# EAGLE board STM32F050F Base Routed (EAGLE 6.0)
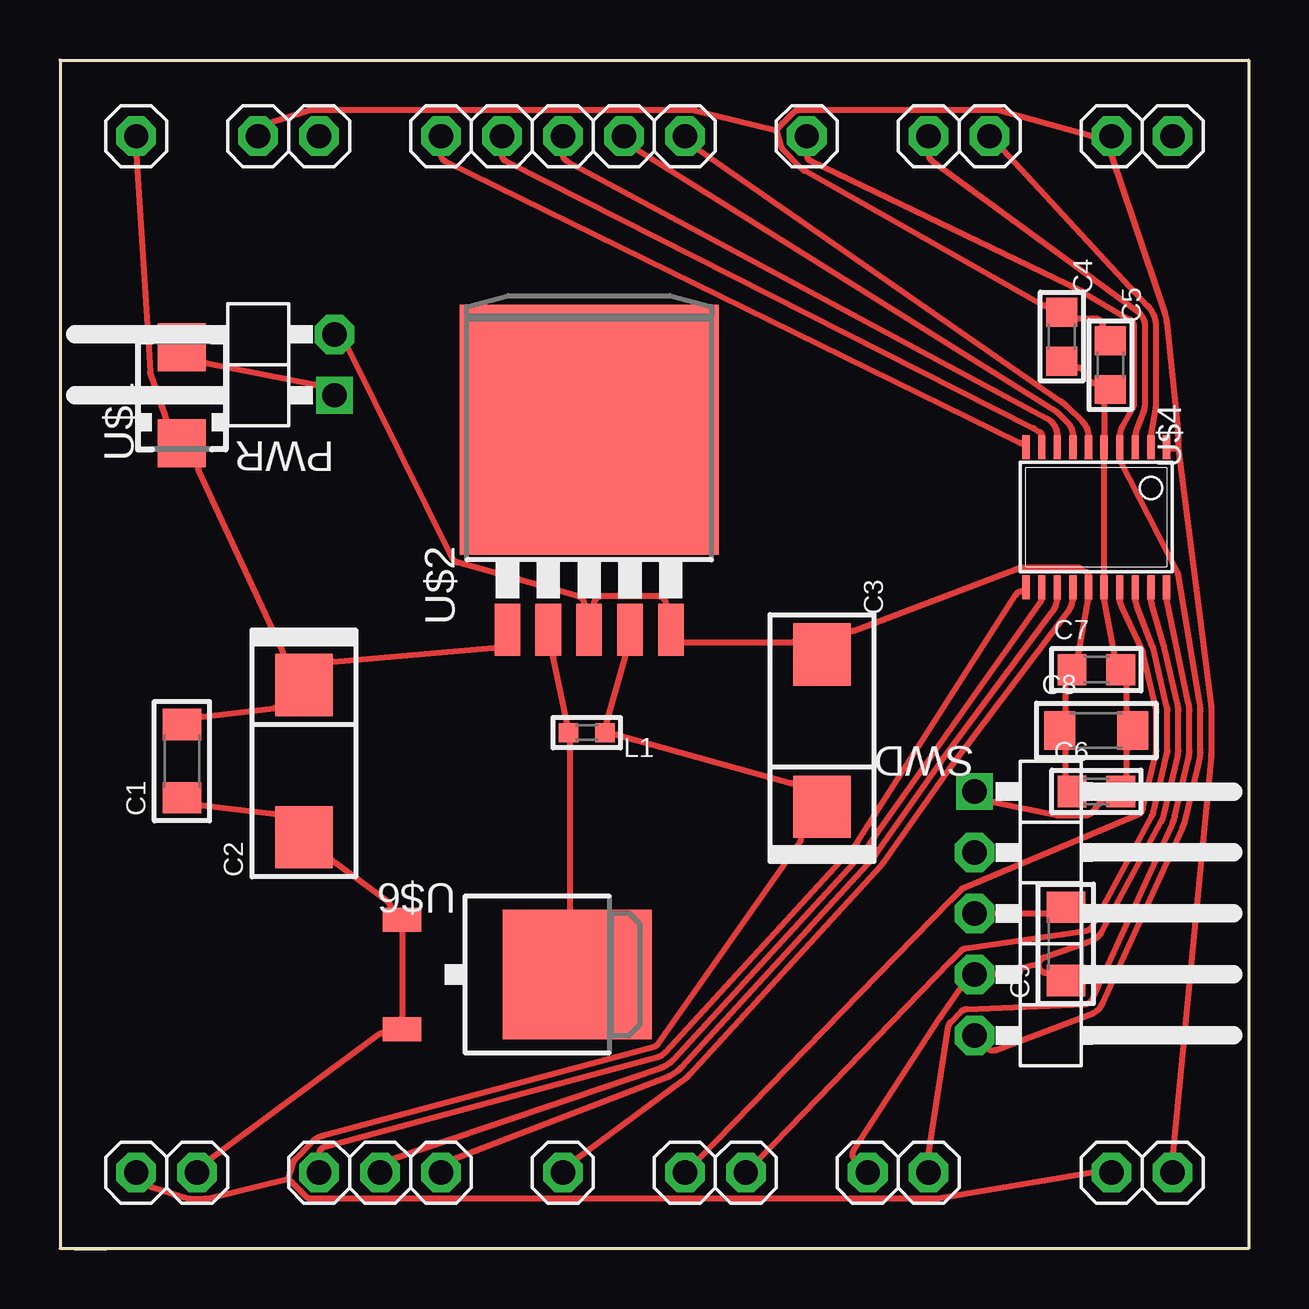
[diagram p0: board, top side]
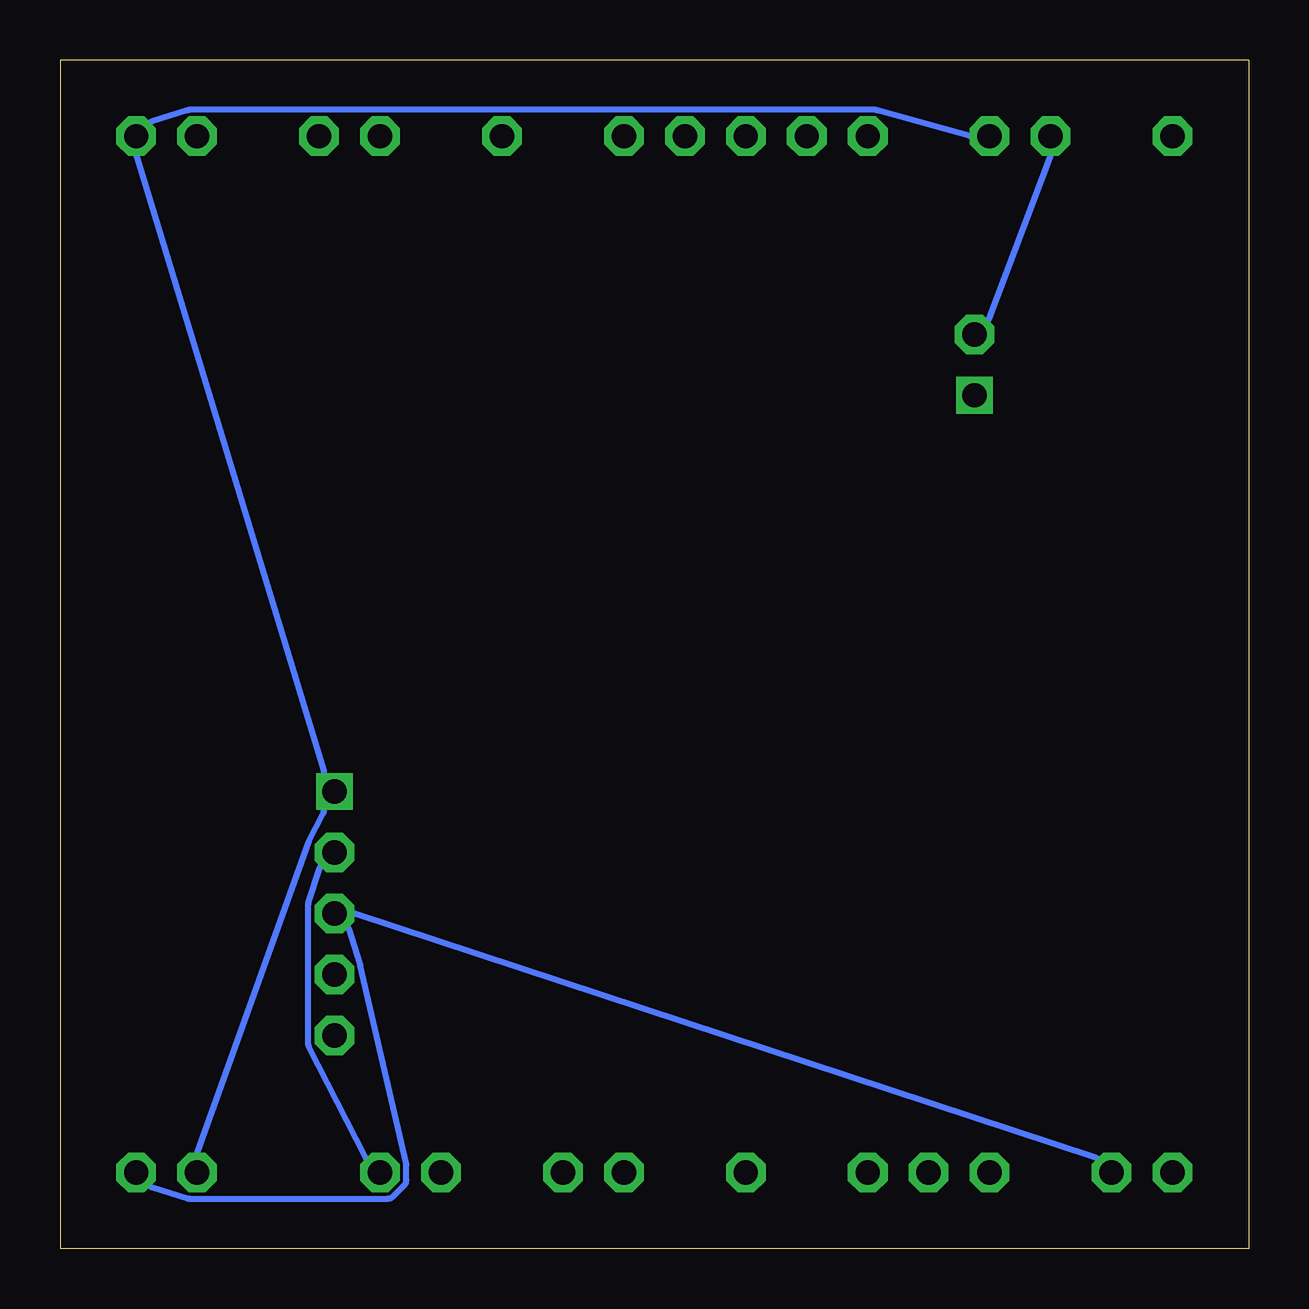
[diagram p1: board, bottom side, seen from below]

Size 49.53 x 49.53 mm. Coordinates in mm from the lower left corner, seen from the top.
Outline: 0,49.52 0,0 49.53,0 49.53,49.52
Outline: 0,49.53 49.53,49.53
Copper layers 1+16: Top 0.035mm / dielectric 0.15mm / Bottom 0.035mm
Design rules: minimum track width 0.254mm, track to track 0.2032mm, copper to edge 1.016mm, minimum pad ring 0.1mm, minimum via ring 0.1mm
Net classes: 0 default: width 0.254 mm, clearance 0.203 mm

## Footprints (pad centres in the part's own frame; a part is rotated, then mirrored left to right if it is on the bottom)
rc-master-smd$ = smd 1.3 x 1.6: 1 -1.524,0; 2 1.524,0
rc-master-smd$' = smd 2.6 x 2.4: + 3.175,0; - -3.175,0
rc-master-smd$'' = smd 1.2 x 1.3: 1 -1.016,0; 2 1.016,0
rc-master-smd$''' = smd 0.8 x 0.8: 1 -0.762,0; 2 0.762,0
pinhead-2$ = drill 1.016 pad 1.524 square: 1 -2.54,-3.81 | drill 1.016 pad 1.649 octagon: 2 0,-3.81
pinhead-2$' = drill 1.016 pad 1.524 square: 1 -5.08,-3.81 | drill 1.016 pad 1.649 octagon: 2 -2.54,-3.81; 3 0,-3.81; 4 2.54,-3.81; 5 5.08,-3.81
my-library$ = smd 2 x 2: A 2,0; C -2,0
my-library$' = smd 1.067 x 2.159: 1 -3.404,-5.791; 2 -1.702,-5.791; 3 0,-5.791; 4 1.702,-5.791; 5 3.404,-5.791 | smd 10.8 x 10.41: 6 0,2.54
my-library$'' = drill 1.016 pad 1.649 octagon: +12V 3.175,46.355; GND1 8.255,46.355; GND2 43.815,46.355; GND3 46.355,3.175; GND4 5.715,3.175; NRST 31.115,46.355; PA0 26.035,46.355; PA1 23.495,46.355; PA2 20.955,46.355; PA3 18.415,46.355; PA4 15.875,46.355; PA5 10.795,3.175; PA6 13.335,3.175; PA7 15.875,3.175; PA9 26.035,3.175; PA10 28.575,3.175; PA13 33.655,3.175; PA14 36.195,3.175; PB1 20.955,3.175; PF0 38.735,46.355; PF1 36.195,46.355; VDD1 10.795,46.355; VDD2 46.355,46.355; VDD3 43.815,3.175; VDD4 3.175,3.175
STM32F0$ = smd 0.305 x 0.991: 1 -2.925,-2.918; 2 -2.275,-2.918; 3 -1.625,-2.918; 4 -0.975,-2.918; 5 -0.325,-2.918; 6 0.325,-2.918; 7 0.975,-2.918; 8 1.625,-2.918; 9 2.275,-2.918; 10 2.925,-2.918; 11 2.925,2.918; 12 2.275,2.918; 13 1.625,2.918; 14 0.975,2.918; 15 0.325,2.918; 16 -0.325,2.918; 17 -0.975,2.918; 18 -1.625,2.918; 19 -2.275,2.918; 20 -2.925,2.918
my-library$''' = smd 1 x 1.6: 1 -2.28,-6.07; 2 2.28,-6.07 | smd 5.4 x 6.2: 3 0,1.23

## Placement (x,y rotation side)
C1  4.7uF  [rc-master-smd$]  5.08,20.32 90 top
C2  100uF 20V  [rc-master-smd$']  10.16,20.32 90 top
C3  330uF 6.3V  [rc-master-smd$']  31.75,21.59 270 top
C4  0.01uf  [rc-master-smd$'']  41.74,38 270 top
C5  1uf  [rc-master-smd$'']  43.76,36.82 270 top
C6  0.1uF  [rc-master-smd$'']  43.18,19.05 0 top
C7  0.1uF  [rc-master-smd$'']  43.18,24.13 0 top
C8  4.7uF  [rc-master-smd$]  43.18,21.59 0 top
C9  [rc-master-smd$]  41.91,12.7 90 top
L1  L_0603  [rc-master-smd$''']  21.95,21.5 180 top
PWR  [pinhead-2$]  7.62,38.1 90 top
SWD  [pinhead-2$']  41.91,13.97 270 top
U$1  10MQ040  [my-library$]  5.08,35.56 90 top
U$2  LM2596S  [my-library$']  22.05,31.58 0 top
U$3  [my-library$'']  0,0 0 top
U$4  STM32F050F4P6  [STM32F0$]  43.18,30.48 180 top
U$6  30WQ03  [my-library$''']  20.32,11.43 270 top

## Library data of the parts
C1 C8 C9 = $C1206
C2 C3 = $C7343/T
C4-C7 = $C0805
L1 = $L0603
PWR = $1X02/90-S
SWD = $1X05/90-S
U$1 = $SMA
U$2 = $TO263-5
U$3 = $STM32_BASE_MINI
U$4 = $TSSOP20
U$6 = $TO252

## Nets
+3V3: C3.+ C4.2 C5.2 C6.2 C7.2 C8.2 L1.1 SWD.1 U$2.4 U$3.VDD1 U$3.VDD2 U$3.VDD3 U$3.VDD4 U$4.5 U$4.16
+12V: C1.2 C2.+ U$1.C U$2.1 U$3.+12V
GND: C1.1 C2.- C3.- C4.1 C5.1 C6.1 C7.1 C8.1 C9.2 PWR.2 SWD.3 U$2.3 U$2.5 U$3.GND1 U$3.GND2 U$3.GND3 U$3.GND4 U$4.1 U$4.15 U$6.1 U$6.2
N$23: PWR.1 U$1.A
N$34: L1.2 U$2.2 U$6.3
NRST: SWD.5 U$3.NRST U$4.4
PA0: U$3.PA0 U$4.6
PA1: U$3.PA1 U$4.7
PA2: U$3.PA2 U$4.8
PA3: U$3.PA3 U$4.9
PA4: U$3.PA4 U$4.10
PA5: U$3.PA5 U$4.11
PA6: U$3.PA6 U$4.12
PA7: U$3.PA7 U$4.13
PA9: U$3.PA9 U$4.17
PA10: U$3.PA10 U$4.18
PA13: C9.1 SWD.4 U$3.PA13 U$4.19
PA14: SWD.2 U$3.PA14 U$4.20
PB1: U$3.PB1 U$4.14
PF0: U$3.PF0 U$4.2
PF1: U$3.PF1 U$4.3

## Tracks (layer width: path | path; a pad name or v marks a point on that pad's centre or on a via)
+3V3
  Top 0.254: 9.52,2.92 9.72,3.58 arc-28 9.8,3.72 10.55,4.49 arc-31 10.91,4.7 24.74,8.41 arc40 24.92,8.54 30.82,16.93 arc35 30.88,17.11 30.88,17.24 C3.+ 30.68,19.39 30.55,19.39 arc-16 30.46,19.4 23.2,21.42 arc16 23.11,21.43 22.98,21.43 L1.1 22.78,21.78 22.78,21.9 arc-16 22.79,21.99 23.53,24.62 arc16 23.55,24.71 23.55,24.84 U$2.4 | U$3.VDD3 43.18,3.17 43.05,3.17 arc10 43,3.17 36.57,2.09 arc-10 36.51,2.08 10.48,2.08 arc-45 10.25,2.18 9.8,2.63 9.79,2.63 9.52,2.92 | U$3.VDD4 3.62,2.73 3.71,2.64 | 3.71,2.64 | 3.71,2.64 arc27 3.84,2.56 5.3,2.1 arc18 5.4,2.08 6.03,2.08 arc14 6.11,2.09 9.52,2.92 | SWD.1 38.73,18.62 38.86,18.62 arc-12 38.93,18.61 41.5,18.08 arc12 41.56,18.07 42.76,18.07 arc53 43.03,18.2 43.33,18.6 arc-53 43.6,18.73 43.72,18.73 C6.2 44.45,19.57 44.45,19.7 44.45,20.79 44.45,20.92 C8.2 44.45,22.26 44.45,22.39 44.45,23.48 44.45,23.61 C7.2 43.93,24.65 43.93,24.78 arc11 43.92,24.84 43.51,27.04 arc-11 43.51,27.07 43.51,27.19 U$4.16 43.51,27.93 43.51,28.06 43.51,32.9 43.51,33.03 U$4.5 43.51,33.77 43.51,33.89 43.51,35.2 43.51,35.33 C5.2 43.24,36.07 43.12,36.07 arc-64 42.82,36.26 42.69,36.53 arc64 42.39,36.72 42.26,36.72 C4.2
  Bottom 0.254: U$3.VDD1 11.43,46.35 11.56,46.35 arc16 11.64,46.37 15.47,47.44 arc-16 15.56,47.45 44.13,47.45 arc-18 44.23,47.43 45.69,46.97 arc-27 45.82,46.89 | 45.82,46.89 | 45.82,46.89 45.91,46.8 U$3.VDD2 46.35,45.72 46.35,45.59 arc-17 46.34,45.5 38.55,19.91 arc17 38.53,19.81 38.53,19.68 SWD.1 38.53,18.41 38.53,18.29 arc27 38.57,18.14 39.16,16.98 arc-7 39.17,16.94 43.8,4.04 arc-20 43.81,3.94 43.81,3.81 U$3.VDD3
+12V
  Top 0.254: U$3.+12V 3.17,45.72 3.17,45.59 arc4 3.18,45.57 3.75,36.54 arc16 3.77,36.45 4.39,34.67 arc-19 4.41,34.56 4.41,34.43 U$1.C 5.75,32.69 5.75,32.56 arc25 5.78,32.42 9.26,24.93 arc-25 9.29,24.8 9.29,24.67 C2.+ | C1.2 5.75,22.16 5.88,22.16 arc7 5.92,22.17 8.92,22.52 arc-7 8.96,22.52 9.09,22.52 C2.+ | C2.+ 11.23,24.46 11.36,24.46 arc5 11.39,24.47 18.08,25.04 arc-5 18.11,25.04 18.24,25.04 U$2.1
GND
  Top 0.254: 29.85,46.61 30.11,46.89 arc-3 30.12,46.9 30.57,47.35 arc-45 30.8,47.45 39.05,47.45 arc-16 39.14,47.44 42.97,46.37 arc16 43.05,46.35 43.18,46.35 U$3.GND2 43.81,45.72 43.81,45.59 arc19 43.83,45.49 46.03,38.98 arc-13 46.11,38.6 46.59,33.93 arc-6 46.59,33.89 46.59,33.33 | 29.85,46.61 30.04,45.95 arc29 30.12,45.81 30.87,45.04 arc16 31.04,44.91 40.93,39.33 arc29 41.09,39.29 41.22,39.29 C4.1 42.26,38.76 42.39,38.76 43.12,38.76 arc-90 43.45,38.43 43.45,38.3 C5.1 | 46.59,33.33 46.26,33.33 46.13,33.33 U$4.1 | 46.59,33.33 47.95,22.72 arc-7 47.97,22.39 47.97,20.79 arc-6 47.96,20.54 46.36,3.97 arc6 46.35,3.94 46.35,3.81 U$3.GND3 | U$3.GND1 8.7,46.8 8.79,46.89 | 8.79,46.89 | 8.79,46.89 arc-27 8.92,46.97 10.38,47.43 arc-18 10.48,47.45 26.35,47.45 arc-14 26.43,47.44 29.85,46.61 | 6.25,3.71 arc-8 6.29,3.74 13.25,8.91 arc-37 13.45,8.98 13.58,8.98 U$6.2 14.25,9.52 14.25,9.65 14.25,13.21 14.25,13.34 U$6.1 13.78,14.08 13.78,14.21 arc53 13.65,14.47 11.36,16.18 11.23,16.18 C2.- 9.09,18.11 8.96,18.11 arc-7 8.92,18.12 5.92,18.47 arc7 5.88,18.48 5.75,18.48 C1.1 | 6.25,3.71 | 6.25,3.71 6.16,3.62 U$3.GND4 | 23.21,27.2 22.58,27.2 arc90 22.25,26.87 22.25,26.74 U$2.3 21.84,26.74 21.84,26.87 arc74 21.6,27.18 16.56,28.59 arc-48 16.35,28.77 12.03,37.48 arc19 11.97,37.56 | 23.21,27.2 | 23.21,27.2 24.28,27.2 24.92,27.2 arc-90 25.25,26.87 25.25,26.74 U$2.5 25.86,25.28 25.98,25.28 30.55,25.28 30.68,25.28 C3.- 32.82,25.73 32.95,25.73 arc21 33.07,25.76 39.99,28.37 arc-21 40.1,28.39 42.36,28.39 arc-31 42.53,28.34 42.78,28.19 arc-59 42.85,28.06 42.85,27.93 U$4.15 42.85,27.19 42.85,27.07 arc-11 42.85,27.04 42.44,24.84 arc11 42.43,24.78 42.43,24.65 C7.1 41.91,23.61 41.91,23.48 41.91,22.39 41.91,22.26 C8.1 41.91,20.92 41.91,20.79 41.91,19.7 41.91,19.57 C6.1
  Top 0.254: 11.97,37.56 | 11.97,37.56 11.88,37.65 PWR.2 | SWD.3 38.73,13.97 38.86,13.97 41.11,13.97 41.24,13.97 C9.2
  Bottom 0.254: U$3.GND3 45.91,2.73 45.82,2.64 | 45.82,2.64 | 45.82,2.64 arc-27 45.69,2.56 44.23,2.1 arc-18 44.13,2.08 35.88,2.08 arc-45 35.65,2.18 35.2,2.63 arc-45 35.1,2.86 35.1,3.49 arc-13 35.11,3.56 37.02,11.82 arc-5 37.02,11.85 37.48,13.3 arc-27 37.56,13.43 | 37.56,13.43 | 37.56,13.43 37.65,13.52 SWD.3 37.47,13.97 37.34,13.97 arc18 37.24,13.95 6.38,3.79 arc27 6.25,3.71 | U$3.GND4 6.16,3.62 6.25,3.71 | 6.25,3.71 | PWR.2 10.98,38.55 10.89,38.64 | 10.89,38.64 | 10.89,38.64 arc-24 10.82,38.75 8.28,45.48 arc-21 8.26,45.59 8.26,45.72 U$3.GND1
N$23
  Top 0.254: PWR.1 10.79,35.99 10.67,35.99 arc-11 10.6,36 6.14,36.88 arc11 6.08,36.89 5.95,36.89 U$1.A
N$34
  Top 0.254: U$6.3 21.25,14 21.25,14.13 21.25,21.1 21.25,21.23 L1.2 21.12,21.78 21.12,21.9 arc12 21.11,21.97 20.55,24.64 arc-12 20.55,24.71 20.55,24.84 U$2.2
NRST
  Top 0.254: U$3.NRST 31.11,45.72 31.11,45.59 arc64 31.29,45.31 42.53,39.91 arc-5 42.56,39.9 44.58,38.72 arc-60 44.75,38.43 44.75,35.2 arc-30 44.7,35.03 44.27,34.28 arc18 44.19,34.06 44.16,33.92 arc12 44.16,33.89 44.16,33.77 U$4.4 44.16,33.03 44.16,32.9 arc27 44.17,32.83 46.55,28.21 arc-18 46.58,28.11 47.49,22.75 arc-10 47.52,22.39 47.52,20.79 arc-13 47.46,20.3 46.9,17.91 arc-11 46.76,17.5 43.43,10.2 arc-45 42.99,9.79 38.97,8.28 arc-66 38.64,8.35 | SWD.5 38.55,8.44 38.64,8.35 | 38.64,8.35
PA0
  Top 0.254: U$3.PA0 26.48,45.91 26.57,45.82 | 26.57,45.82 | 26.57,45.82 arc10 26.62,45.78 41.72,35.29 arc-10 41.95,35.1 42.61,34.45 arc-33 42.82,34.06 42.85,33.92 arc-12 42.85,33.89 42.85,33.77 U$4.6
PA1
  Top 0.254: U$3.PA1 23.94,45.91 24.03,45.82 | 24.03,45.82 | 24.03,45.82 arc13 24.09,45.77 41.41,34.95 arc-13 41.63,34.78 41.96,34.45 arc-33 42.17,34.06 42.2,33.92 arc-12 42.2,33.89 42.2,33.77 U$4.7
PA2
  Top 0.254: U$3.PA2 20.95,45.72 20.95,45.59 arc62 21.12,45.31 41.12,34.59 arc-50 41.52,34.06 41.55,33.92 arc-12 41.55,33.89 41.55,33.77 U$4.8
PA3
  Top 0.254: U$3.PA3 18.41,45.72 18.41,45.59 arc63 18.59,45.31 40.56,34.19 arc-4 40.58,34.18 40.83,34.02 arc-59 40.91,33.89 40.91,33.77 U$4.9
PA4
  Top 0.254: U$3.PA4 15.88,45.72 15.88,45.59 arc64 16.05,45.31 39.96,33.6 arc26 40.1,33.56 40.23,33.56 U$4.10
PA5
  Top 0.254: U$3.PA5 10.79,3.81 10.79,3.94 arc-75 11.03,4.24 24.86,7.97 arc32 25.23,8.2 33.19,16.89 arc10 33.23,16.94 39.83,27.25 arc-57 40.1,27.4 40.23,27.4 U$4.11
PA6
  Top 0.254: U$3.PA6 13.78,3.62 13.87,3.71 | 13.87,3.71 | 13.87,3.71 arc-26 13.99,3.79 25.05,7.55 arc29 25.57,7.89 33.53,16.58 arc7 33.59,16.66 36.32,20.53 40.88,26.98 arc35 40.91,27.07 40.91,27.19 U$4.12
PA7
  Top 0.254: U$3.PA7 16.32,3.62 16.41,3.71 | 16.41,3.71 | 16.41,3.71 arc-24 16.52,3.79 25.26,7.14 arc27 25.91,7.58 33.87,16.27 arc7 33.97,16.4 36.69,20.27 arc-1 36.7,20.28 41.39,26.6 arc25 41.52,26.9 41.55,27.04 arc12 41.55,27.07 41.55,27.19 U$4.13
PA9
  Top 0.254: U$3.PA9 26.48,3.62 26.57,3.71 | 26.57,3.71 | 26.57,3.71 26.58,3.72 37.1,14.52 37.55,14.97 arc-22 37.66,15.04 44.92,18.09 arc54 45.12,18.32 45.68,20.71 arc13 45.69,20.79 45.69,22.39 arc13 45.68,22.46 45.12,24.86 arc12 45.09,24.92 44.24,26.73 arc-13 44.19,26.9 44.16,27.04 arc-12 44.16,27.07 44.16,27.19 U$4.17
PA10
  Top 0.254: U$3.PA10 29.02,3.62 29.11,3.71 | 29.11,3.71 | 29.11,3.71 29.12,3.72 37.1,11.97 37.1,11.98 37.55,12.43 arc-37 37.74,12.52 42.76,13.25 arc53 43,13.42 45.49,18.02 arc15 45.56,18.22 46.12,20.61 arc13 46.14,20.79 46.14,22.39 arc13 46.12,22.57 45.56,24.96 arc8 45.53,25.06 44.87,26.79 arc-9 44.84,26.9 44.81,27.04 arc-12 44.8,27.07 44.8,27.19 U$4.18
PA13
  Top 0.254: U$3.PA13 33.21,3.62 33.12,3.71 | 33.12,3.71 | 33.12,3.71 arc-78 33.08,4.11 36.68,9.64 arc-2 36.69,9.66 37.53,10.85 arc-10 37.56,10.89 | 37.56,10.89 | 37.56,10.89 37.65,10.98 SWD.4 38.73,11.43 38.86,11.43 arc13 38.93,11.44 40.77,11.87 | 40.77,11.87 40.78,11.78 arc82 41.11,11.5 41.24,11.5 C9.1 | 40.77,11.87 40.8,11.95 arc-48 41,12.14 42.97,12.83 arc42 43.4,13.2 45.89,17.81 arc15 46.01,18.12 46.57,20.51 arc13 46.6,20.79 46.6,22.39 arc13 46.57,22.67 46.01,25.06 arc3 45.99,25.12 45.5,26.85 arc-4 45.49,26.9 45.46,27.04 arc-12 45.45,27.07 45.45,27.19 U$4.19
PA14
  Top 0.254: U$3.PA14 36.2,3.81 36.2,3.94 arc-9 36.2,3.98 37.01,9.26 arc-36 37.1,9.44 37.55,9.89 arc-43 37.77,9.98 42.72,10.2 arc63 43.01,10.39 46.35,17.69 arc11 46.45,18.01 47.01,20.4 arc13 47.06,20.79 47.06,22.39 arc12 47.02,22.74 46.11,27.04 arc-12 46.1,27.07 46.1,27.19 U$4.20
  Bottom 0.254: U$3.PA14 36.64,3.62 36.73,3.71 | 36.73,3.71 | 36.73,3.71 arc18 36.79,3.79 39.16,8.42 arc27 39.19,8.57 39.19,14.29 arc18 39.18,14.38 38.72,15.84 arc27 38.64,15.97 | 38.64,15.97 | 38.64,15.97 38.55,16.06 SWD.2
PB1
  Top 0.254: U$3.PB1 21.4,3.62 21.49,3.71 | 21.49,3.71 | 21.49,3.71 arc-9 21.53,3.75 25.93,6.99 arc11 26.24,7.27 34.21,15.96 arc7 34.34,16.13 37.07,20 arc-2 37.07,20.01 42.03,26.59 arc25 42.17,26.9 42.2,27.04 arc12 42.2,27.07 42.2,27.19 U$4.14
PF0
  Top 0.254: U$3.PF0 39.18,45.91 39.27,45.82 | 39.27,45.82 | 39.27,45.82 arc-2 39.28,45.81 45.33,39.28 arc-43 45.66,38.43 45.66,35.2 arc-10 45.64,34.99 45.46,33.92 arc10 45.45,33.89 45.45,33.77 U$4.2
PF1
  Top 0.254: U$3.PF1 36.2,45.72 36.2,45.59 arc54 36.32,45.34 44.88,39.07 arc-54 45.2,38.43 45.2,35.2 arc-21 45.15,34.92 44.87,34.17 arc9 44.84,34.06 44.81,33.92 arc12 44.8,33.89 44.8,33.77 U$4.3